# Altium PCB 电机驱动2.PcbDoc
Units mm, origin at the board's own origin, x right, y up, seen from the top; angles counter-clockwise.
Board outline 70.33 x 33.03 mm, 2 copper layers (Top Layer, Bottom Layer); 44 components, 28 nets, 129 pads, 42 vias.
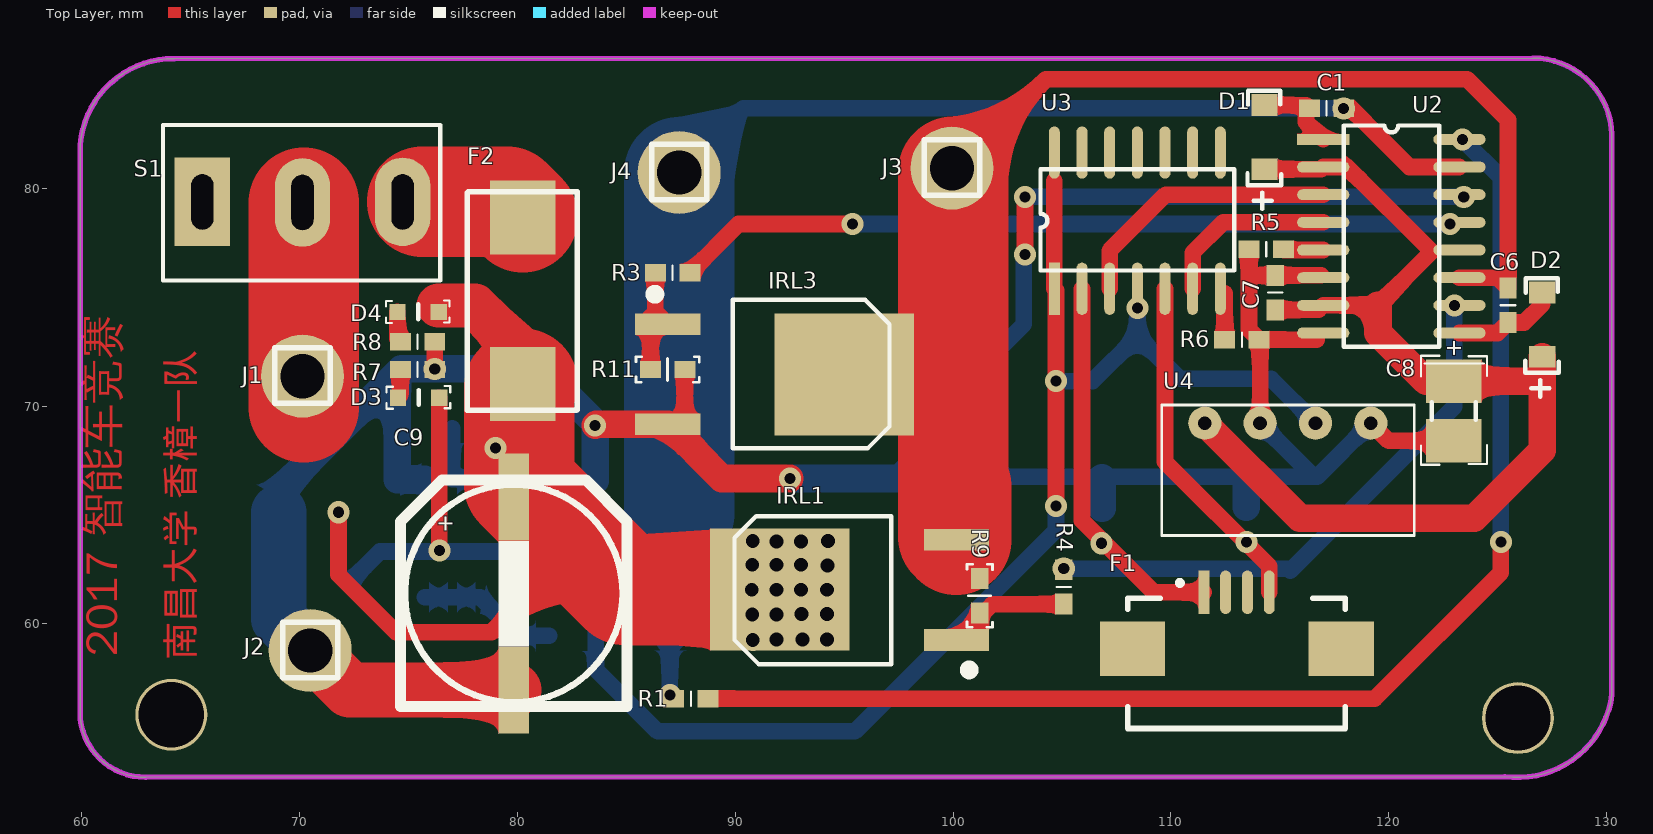
[diagram p0: Top Layer view]
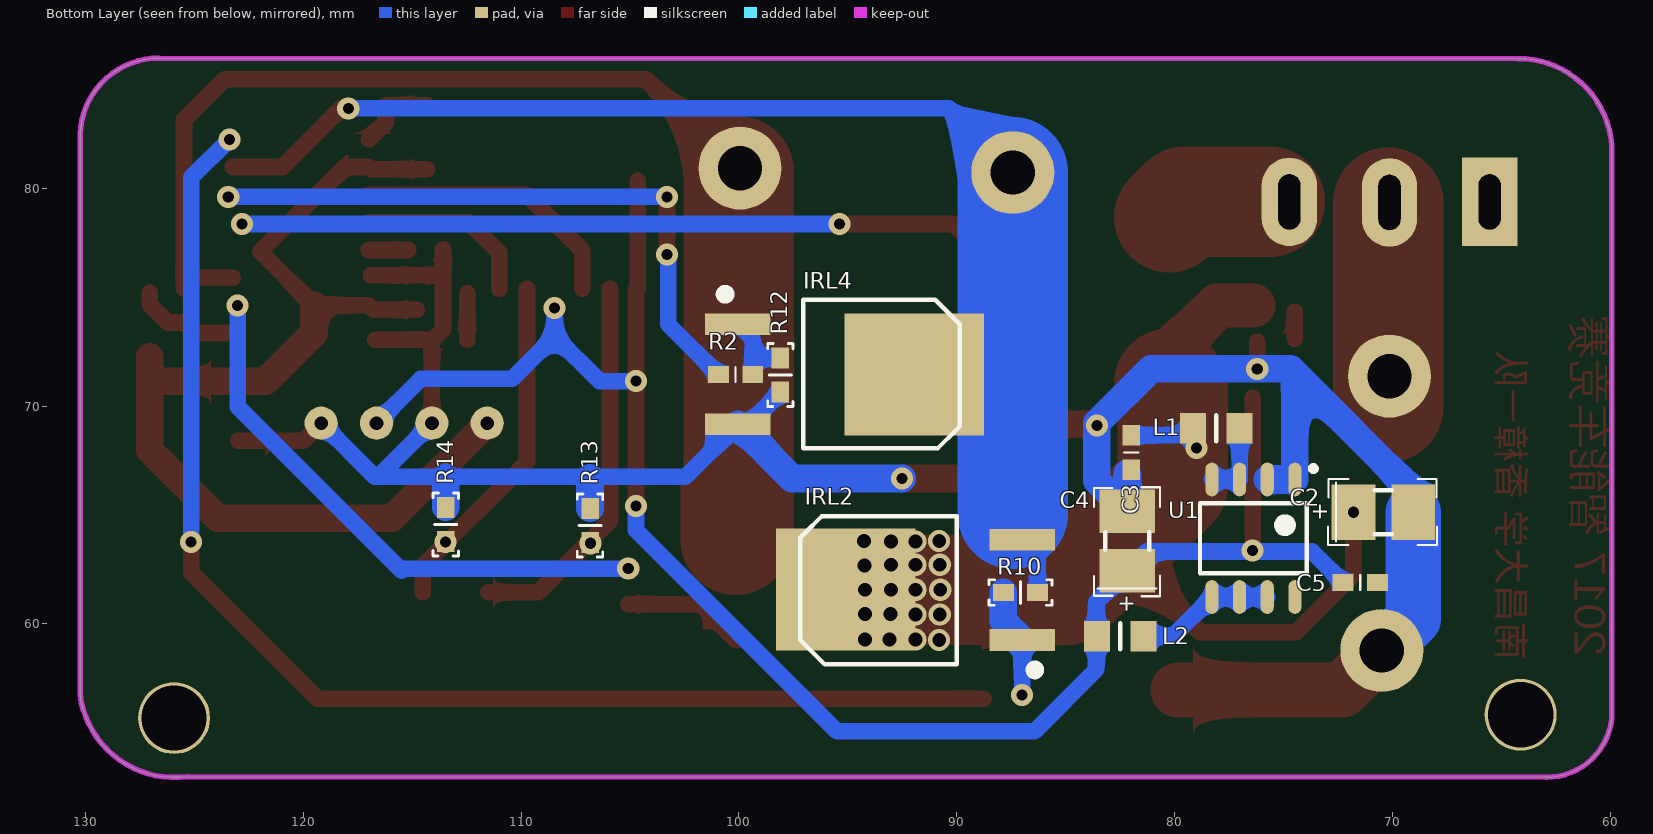
[diagram p1: Bottom Layer view, seen from below]
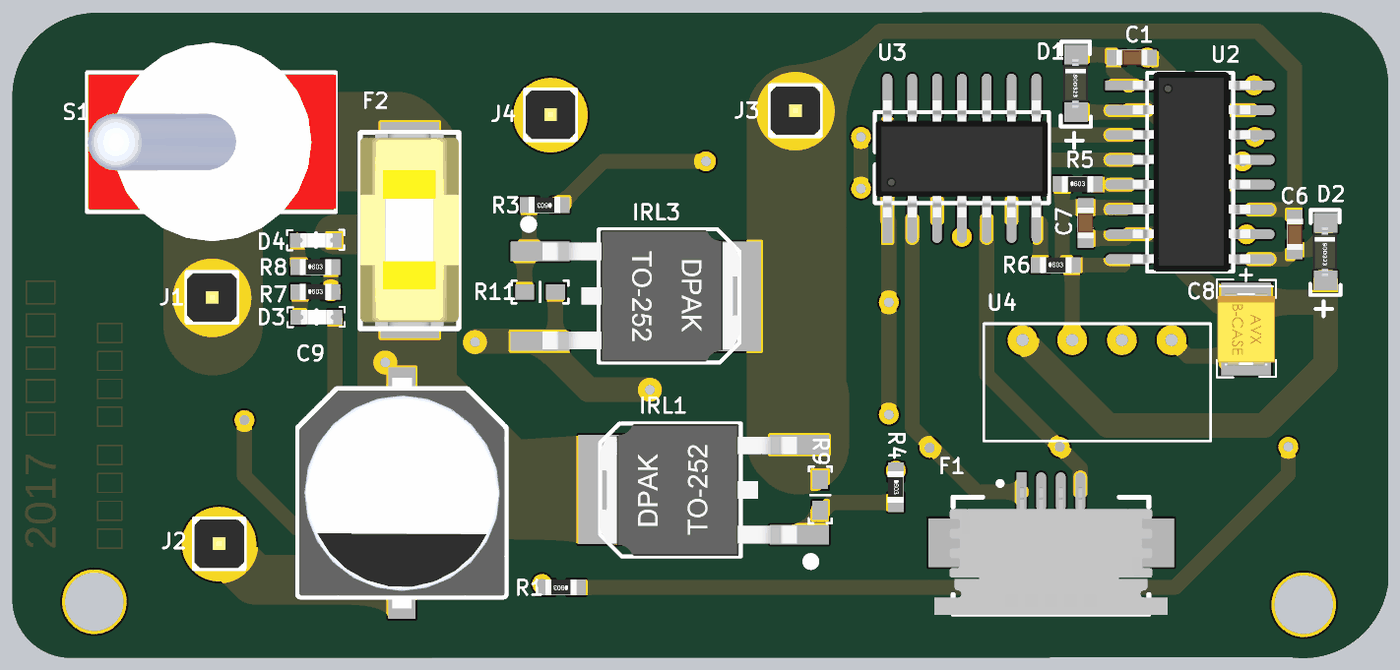
[diagram p2: 3D render of the assembled board from above, using the file's embedded part models]
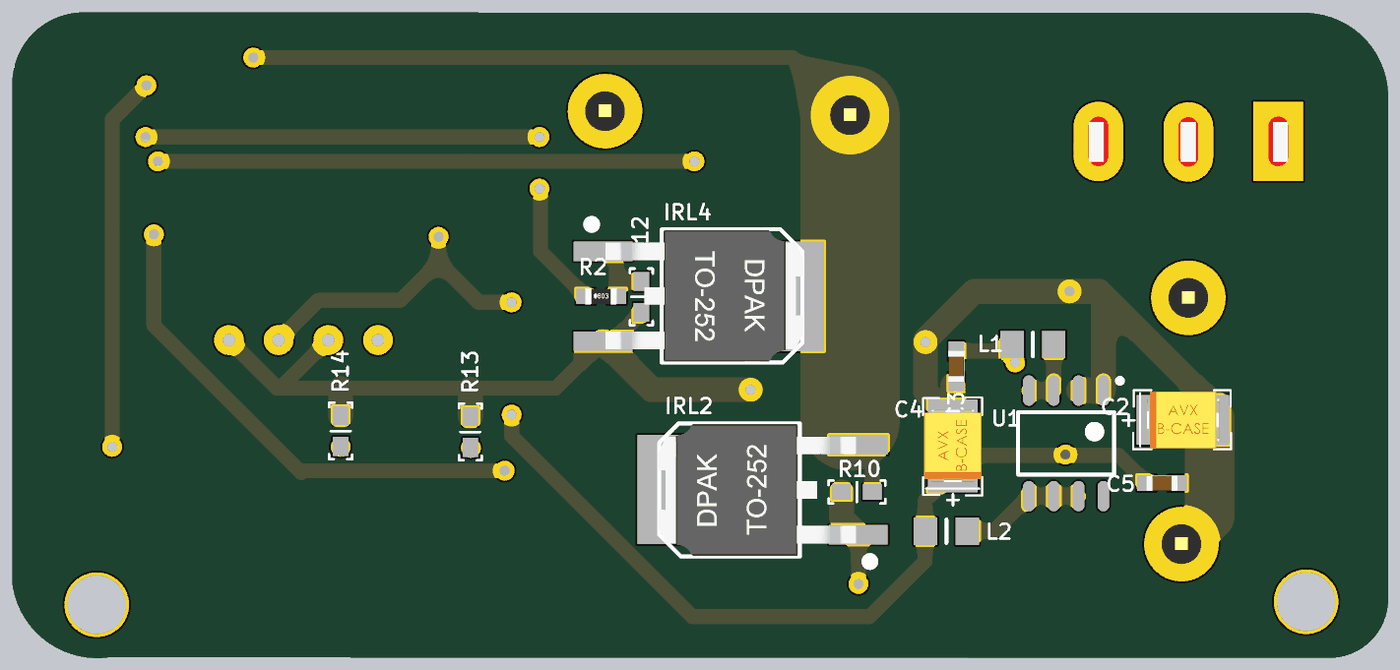
[diagram p3: 3D render of the assembled board from below, using the file's embedded part models]

## Layer stack, top to bottom
Top Solder: solder mask 0.0102, Solder Resist, Dk 3.5
Top Layer: signal copper 0.0356
Dielectric 1: dielectric 0.32, FR-4, Dk 4.8
Bottom Layer: signal copper 0.0356
Bottom Solder: solder mask 0.0102, Solder Resist, Dk 3.5

## Board outline
59.919,55.931 ccw(c62.913,55.954) 62.937,52.96 125.324,52.984 ccw(c125.902,57.331) 130.248,56.753 130.248,82.458 ccw(c126.615,82.342) 126.62,85.977 126.614,85.978 64.237,85.954 ccw(c64.211,81.66) 59.917,81.66 59.919,81.636

## Design rules (kind name [scope] priority, off if disabled: settings)
Clearance [All] p1: gap=0.254
PolygonConnect [All] p1: connectstyle=Relief reliefconductorwidth=0.254 reliefentries=4 polygonreliefangle="90 Angle" airgapwidth=0.254
RoutingVias [All] p1: holewidth=0.508 width=1.016 viastyle="Through Hole" minholewidth=0.508 minwidth=1.016 maxholewidth=0.508 maxwidth=1.016
SolderMaskExpansion [All] p1: expansion=0.102
Width [All] p1: maxlimit=7.62 minlimit=0.076 preferedwidth=0.762
29 further rules are at their usual default settings.

## Components (designator, comment, footprint, x,y, rotation, side; value= is the part's Value field where it differs from the comment)
C1 "CAP-0603(1608)" CAP-0603 117.145,83.668 r0 top
C2 "CAP-TAN-3528(B)" CAP-3528 70.409,65.126 r180 bottom
C3 "CAP-0603(1608)" CAP-0603 81.991,67.869 r90 bottom
C4 "CAP-TAN-3528(B)" CAP-3528 82.169,63.805 r90 bottom
C5 "CAP-0603(1608)" CAP-0603 71.476,61.9 r0 bottom
C6 "CAP-0603(1608)" CAP-0603 125.476,74.625 r90 top
C7 "CAP-0603(1608)" CAP-0603 114.783,75.209 r270 top
C8 "CAP-TAN-3528(B)" CAP-3528 122.987,69.774 r270 top
C9 "CAP-SMD-1000UF" CAP-SMD-1000UF 79.223,61.366 r270 top
D1 "1N5819-S4" SOD-323 114.427,82.448 r90 top
D2 "1N5819-S4" SOD-323 127.178,73.838 r90 top
D3 "LED-0603" LED-0603 75.463,70.383 r180 top
D4 "LED-0603" LED-0603 75.438,74.32 r180 top
F1 "FPC-1.0-4" FPC-1.0-4 112.878,58.623 r0 top
F2 "FUSE-1808-Base" Fuse1808_Base 80.239,78.664 r270 top
IRL1 "IRLR7843" TO-252 100.101,61.646 r90 top
IRL2 "IRLR7843" TO-252 87.046,61.646 r90 bottom
IRL3 "IRLR7843" TO-252 86.944,71.374 r270 top
IRL4 "IRLR7843" TO-252 100,71.374 r270 bottom
J1 "IN+" HEADER1X1 70.129,71.399 r0 top
J2 "IN-" HEADER1X1 70.485,58.801 r0 top
J3 "OUT-" HEADER1X1 99.949,80.95 r0 top
J4 "OUT+" HEADER1X1 87.427,80.747 r0 top
L1 "INTUCTOR" "L0805 - duplicate" 78.08,68.986 r0 bottom
L2 "INTUCTOR" "L0805 - duplicate" 82.499,59.436 r0 bottom
R1 "RES-0603" RES-0603 87.96,56.566 r180 top
R2 "RES-0603" RES-0603 100.152,71.45 r180 bottom
R3 "RES-0603" RES-0603 87.122,76.124 r180 top
R4 "RES-0603" RES-0603 105.08,61.697 r270 top
R5 "RES-0603" RES-0603 114.376,77.191 r0 top
R6 "RES-0603" RES-0603 113.259,73.05 r0 top
R7 "RES-0603" RES-0603 75.413,71.679 r0 top
R8 "RES-0603" RES-0603 75.413,72.949 r0 top
R9 "RES" 0603RC 101.219,62.078 r270 top
R10 "RES" 0603RC 86.284,61.443 r0 bottom
R11 "RES" 0603RC 87.681,71.679 r180 top
R12 "RES" 0603RC 98.095,70.637 r90 bottom
R13 "1K" 0603RC 106.832,65.303 r270 bottom
R14 "1K" 0603RC 113.462,65.354 r270 bottom
S1 "SW-B" SW-B 70.129,79.35 r0 top
U1 "TPS7350" TPS7350(7333) 76.378,63.932 r270 bottom
U2 "HIP4082IB" SOIC16 116.992,82.245 r0 top
U3 "74HC08" SOIC14 104.648,75.514 r90 top
U4 "B0512-S-1W" B0512_S_1W 115.113,67.183 r0 top

## Footprints (in the part's own frame and the unit in brackets; to place one, negate y for a bottom-side part, rotate by r counter-clockwise, add the part's x,y. Pads: shape width x height; smd on the part's side, far side on the other; paste and mask are expansions set on the pad)
0603RC [mm]
  rect 0.965x0.8 smd: 1(0,0) 2(1.575,0)
  silkscreen extent -0.66,-0.58 2.24,0.58
B0512_S_1W [mil]
  round 60 hole 25: 1(160,80) 2(60,80) 3(-40,80) 4(-140,80)
  silkscreen extent -218,-123 239,113
CAP-0603 [mm]
  rect 0.96x0.8 smd: 1(-0.79,0) 2(0.79,0)
  silkscreen extent 0,-0.33 0,0.33, body extent -0.8,-0.41 0.8,0.41, height 0.8
CAP-3528 [mm]
  rect 2x2.54 smd: 1(-1.373,0) 2(1.373,0)
  silkscreen extent -2.54,-1.5 2.47,1.52, body extent -1.85,-1.47 1.85,1.46, height 2.03
CAP-SMD-1000UF [mm]
  rect 4x1.4 smd: 1(-4.455,0.61) 2(4.404,0.61)
  silkscreen extent -5.23,-4.59 5.16,5.81, body extent -5.93,-4.64 5.87,5.86, height 10.3
FPC-1.0-4 [mm]
  rect 3x2.5 smd: 0(-4.64,0.227) 0(4.936,0.227)
  rect 0.5x2 smd: 1(-1.365,2.825)
  oval 0.5x2 smd: 2(-0.365,2.825) 3(0.635,2.825) 4(1.635,2.825)
  silkscreen extent -4.87,-3.43 5.13,3.36, body extent -5.82,-3.47 6.1,3.08, height 2.66
Fuse1808_Base [mm]
  rect 3.4x3 smd: 1(0,0) 2(7.645,0)
  silkscreen extent -1.17,-2.54 8.86,2.5, body extent -1.1,-2.54 8.72,2.49, height 3.81
HEADER1X1 [mil]
  round 150 hole 80: 1(0,-0.99)
  silkscreen extent -50,-50 50,50, body extent -50,-49 50,49, height 336
"L0805 - duplicate" [mm]
  rect 1.2x1.4 smd: 1(-1.067,0) 2(1.067,0)
  silkscreen extent 0,-0.6 0,0.6
LED-0603 [mm]
  rect 0.746x0.749 smd: 1(-0.95,0) 2(0.951,0)
  silkscreen extent -1.45,-0.53 1.47,0.51, body extent -0.85,-0.37 0.8,0.36, height 0.68
RES-0603 [mm]
  rect 0.96x0.8 smd: 1(-0.79,0) 2(0.79,0)
  silkscreen extent 0,-0.33 0,0.33, body extent -0.8,-0.41 0.8,0.41, height 0.45
SOD-323 [mm]
  rect 1x1.2 smd: 1(-1.575,0.127) 2(1.372,0.127)
  silkscreen extent -3.4,-0.64 2.03,0.91, body extent -1.35,-0.46 1.15,0.79, height 1
SOIC14 [mm]
  rect 2.4x0.5 smd: 1(-0.127,0)
  oval 2.4x0.5 smd: 2(-0.127,-1.27) 3(-0.127,-2.54) 4(-0.127,-3.81) 5(-0.127,-5.08) 6(-0.127,-6.35) 7(-0.127,-7.62) 8(6.127,-7.62) 9(6.127,-6.35) 10(6.127,-5.08) 11(6.127,-3.81) 12(6.127,-2.54) 13(6.127,-1.27) 14(6.127,0)
  silkscreen extent 0.71,-8.25 5.36,0.64, body extent -0.03,-8.2 5.97,0.6, height 1.7
SOIC16 [mm]
  rect 2.4x0.5 smd: 1(0,0)
  oval 2.4x0.5 smd: 2(0,-1.27) 3(0,-2.54) 4(0,-3.81) 5(0,-5.08) 6(0,-6.35) 7(0,-7.62) 8(0,-8.89) 9(6.254,-8.89) 10(6.254,-7.62) 11(6.254,-6.35) 12(6.254,-5.08) 13(6.254,-3.81) 14(6.254,-2.54) 15(6.254,-1.27) 16(6.254,0)
  silkscreen extent 0.94,-9.53 5.33,0.64, body extent 0.2,-9.52 6.2,0.68, height 1.7
SW-B [mil]
  rect 100x160 hole 40 slot 100 at 90 deg: 1(-181,1)
  oval 100x160 hole 40 slot 100 at 90 deg: 2(0,0) 3(181,1)
  silkscreen extent -252,-141 249,140, body extent -251,-200 250,200, height 1120
TO-252 [mm]
  rect 1x3 smd: 1(-2.388,-0.051) 3(2.212,-0.051)
  rect 5.6x6.4 smd: 2(-0.076,8.052)
  silkscreen extent -3.94,-0.81 3.3,10.13, body extent -3.47,0.08 3.27,10.18, height 2.37
TPS7350(7333) [mm]
  oval 1.55x0.6 smd: 1(-2.7,1.905) 2(-2.7,0.635) 3(-2.7,-0.635) 4(-2.7,-1.905) 5(2.7,-1.905) 6(2.7,-0.635) 7(2.7,0.635) 8(2.7,1.905)
  silkscreen extent -3.32,-2.45 1.6,2.87

## Part data
C2 C4 C8: "0.15~150UF"
D1 D2: "S4"
F2: "保险丝"
J1 J2 J3 J4: library part Header1x1
R1 R2 R3 R4 R5 R6: library part RES-0805
R13 R14: library part Res2, "Resistor"

## Free pads (board coordinates)
  round 3.302 hole 2.997: 0(64.11,55.829) 0(125.933,55.677)

## Via types
v1: diameter 1.016, hole 0.508, Top Layer to Bottom Layer, 22 vias
v2: diameter 1.016, hole 0.635, Top Layer to Bottom Layer, 20 vias

## Nets (pads, with @x,y where several pads share a name; then routed paths per layer and width w, separated by ;. In a path a pad name is that pad's centre, name@x,y a point inside that pad or via, vN(x,y) a via of type N, cw(c..) or ccw(c..) an arc to the next point about the centre after c; other vN are vias at no path point)
5V: C4.1 C5.2 D3.1 L2.2 U3.1 U3.4 U3.14 U4.2 | length 80.8
  Top Layer w0.762: v1(76.414,63.362) D3.1 ; U3.1 104.648,80.34 ; v1(104.724,65.405) v1(104.724,71.145) U3.1@104.724,75.311
  Bottom Layer w0.762: C5.2 73.688,63.322 81.278,63.322 C4.1 83.591,61.009 83.591,57.912 86.436,55.067 95.493,55.067 104.724,64.298 v1(104.724,65.405) ; v1(104.724,71.145) 106.401,71.145 108.458,73.203 ; v1(108.458,74.498) 108.458,73.203 ; U4.2 114.605,71.247 110.414,71.247 108.458,73.203
7.2_MOTOR: C2.1 C3.2 C9.1 D4.1 F2.2 IRL1.2 IRL2.2 L1.2 | length 44.8
  Top Layer w0.762: v1(71.782,65.126) 71.782,62.254 74.422,59.614 78.816,59.614 82.834,63.632
  Top Layer w2.032: D4.1@76.388,74.619 78.035,74.619 80.239,72.415 F2.2
  Top Layer w5.08: F2.2 80.086,70.866 80.086,66.38 82.834,63.632 84.897,61.57 v2(90.754,61.57) v2(91.897,61.57) IRL1.2
  Bottom Layer w0.762: v1(78.983,68.069) 79.573,68.659 C3.2
  other v2: 90.805,59.258 91.897,59.284 93.091,59.284 94.209,59.284 90.78,60.427 91.897,60.427 93.04,60.452 94.209,60.452 93.015,61.57 94.209,61.57 94.234,62.687 90.78,62.713 91.897,62.713 93.015,62.713 91.897,63.779 93.015,63.779 90.805,63.805 94.259,63.805
12V: C7.2 C8.1 D1.1 D2.1 U2.2 U2.7 U2.12 U4.4 | length 49.6
  Top Layer w0.762: D1.1 U2.2@116.891,80.874 ; C7.2 U2.7@116.787,74.419 ; U2.7 119.509,74.625 121.973,77.089 118.086,80.975 U2.2
  Top Layer w1.27: U4.4 115.926,64.846 123.927,64.846 127.051,67.97 D2.1 ; 119.509,74.625 119.509,73.353 121.715,71.147 C8.1 126.897,71.147
AGND: C2.2 C3.1 C4.2 C5.1 C7.1 C8.2 C9.2 IRL3.3 IRL4.3 J2.1 R5.1 R6.2 R7.2 R8.2 R11.1 R12.1 R13.1 R14.1 U1.1 U1.2 U2.6 U2.8 U4.1 U4.3 | length 119.1
  Top Layer w0.762: R7.2 v1(76.203,71.707) R8.2 ; 87.681,68.504 R11.1 ; R5.1 113.586,75.893 ; U4.3 R6.2@114.097,73.002 ; 116.688,73.05 R6.2 113.586,73.513 113.586,75.893 ; U2.6@116.888,75.999 C7.1 113.693,75.999 113.586,75.893 ; U4.1 119.991,68.4 C8.2
  Top Layer w1.27: v1(83.566,69.113) 83.614,69.162 IRL3.3 89.38,66.675 v1(92.507,66.675)
  Top Layer w2.54: J2.1 72.299,56.962 C9.2
  Bottom Layer w0.762: R12.1 IRL4.3@99.571,69.162 ; IRL4.3 102.461,66.751 116.561,66.751 ; U4.3 116.561,66.751 ; U4.1 116.713,66.751 116.561,66.751
  Bottom Layer w1.27: C2.2 69.035,66.064 74.473,71.501 ; U1.2 U1.1 74.473,71.501 ; C3.1@82.169,66.901 C4.2 83.566,66.575 v1(83.566,69.113) 83.566,69.221 81.08,71.707 v1(76.203,71.707) 74.679,71.707 74.473,71.501 ; v1(92.507,66.675) 97.564,66.675 IRL4.3 ; R13.1 106.832,66.7 ; R14.1 113.462,66.726
  Bottom Layer w2.54: C2.2 69.035,60.226 J2.1
DGND: R6.1 U3.7 | length 2.1
  Top Layer w0.762: R6.1 U3.7@112.469,75.187
MOTOR1+: C1.2 IRL2.3 IRL4.2 J4.1 R10.1 U2.15 | length 55.6
  Top Layer w0.762: C1.2@117.935,83.589 C1.2 118.262,83.668 120.955,80.975 U2.15
  Bottom Layer w0.762: R10.1 86.284,63.147 ; J4.1 90.373,83.668 v1(117.932,83.668)
  Bottom Layer w5.08: 87.427,65.068 J4.1
MOTOR1-: C6.2 IRL1.3 IRL3.2 J3.1 R9.1 U2.11 | length 57.6
  Top Layer w0.762: J3.1@100,80.747 104.267,85.014 123.596,85.014 125.476,83.134 C6.2 124.996,75.895 U2.11
  Top Layer w5.08: IRL1.3@100,64.011 100,66.446 ; J3.1@100,80.747 100,66.446 ; IRL1.3 100.152,66.294 100,66.446
NetC1_1: C1.1 D1.2 U2.1 | length 3.7
  Top Layer w0.762: D1.2 116.202,83.82 C1.1 ; C1.1@116.202,83.515 116.202,83.035 U2.1
NetC6_1: C6.1 D2.2 U2.9 | length 4.9
  Top Layer w0.762: U2.9 124.996,73.355 C6.1 126.21,73.835 127.051,74.676 D2.2
NetD3_2: D3.2 R7.1 | length 1.2
  Top Layer w0.762: D3.2@74.623,70.493 R7.1
NetD4_2: D4.2 R8.1 | length 1.2
  Top Layer w0.762: R8.1@74.487,73.084 D4.2
NetF2_1: F2.1 S1.3 | length 4.9
  Top Layer w5.08: S1.3@75.641,79.375 79.527,79.375 F2.1
NetIRL1_1: IRL1.1 R4.2 R9.2 | length 5.5
  Top Layer w0.762: IRL1.1 101.75,60.856 ; 101.801,60.907 R4.2
NetIRL2_1: IRL2.1 R1.2 R10.2 | length 5.1
  Bottom Layer w0.762: v1(86.995,56.741) IRL2.1
  Bottom Layer w1.27: IRL2.1 87.859,60.122 R10.2
NetIRL3_1: IRL3.1 R3.2 R11.2 | length 5
  Top Layer w0.762: R11.2 IRL3.1@86.106,74.097 ; R3.2 86.332,74.323 IRL3.1
NetIRL4_1: IRL4.1 R2.2 R12.2 | length 3.9
  Bottom Layer w0.762: R12.2 99.362,72.212 ; R2.2 99.362,73.073 IRL4.1
NetJ1_1: J1.1 S1.2 | length 9.4
  Top Layer w5.08: J1.1@70.18,69.952 S1.2@70.18,79.324
NetL1_2: L1.1 U1.3 U1.4 | length 3.6
  Bottom Layer w0.762: L1.1 U1.3 U1.4
NetL2_1: L2.1 U1.5 U1.6 U1.7 | length 6.4
  Bottom Layer w0.762: U1.7 U1.6 U1.5 80.053,59.461 L2.1@81.458,59.461
NetR1_1: R1.1 U2.16 | length 59.4
  Top Layer w0.762: R1.1 119.355,56.566 125.146,62.357 v1(125.146,63.754)
  Bottom Layer w0.762: v1(123.393,82.245) 125.146,80.493 v1(125.146,63.754)
NetR2_1: R2.1 U2.14 | length 29.3
  Top Layer w0.762: v1(103.302,76.962) v1(103.302,79.604)
  Bottom Layer w0.762: R2.1 103.251,73.759 103.251,76.911 v1(103.302,76.962) ; v1(103.302,79.604) v1(123.444,79.604)
NetR3_1: R3.1 U2.13 | length 35.8
  Top Layer w0.762: R3.1 90.147,78.359 v1(95.377,78.359)
  Bottom Layer w0.762: v1(95.377,78.359) v1(122.809,78.359)
NetR4_1: R4.1 U2.10 | length 25.6
  Bottom Layer w0.762: v1(105.08,62.535) 115.372,62.535 ; 115.471,62.436 123.012,69.977 v1(123.012,74.625)
NetR5_2: R5.2 U2.5 | length 1.8
  Top Layer w0.762: R5.2@115.192,77.165 U2.5
PWM1: F1.4 R14.2 U3.5 | length 15.9
  Top Layer w0.762: U3.5 109.728,67.437 114.513,62.652 F1.4
  other v1: 113.462,63.754
PWM1N1: U2.4 U3.6 | length 8.2
  Top Layer w0.762: U3.6 110.998,77.038 112.395,78.435 U2.4
PWM1N2: U2.3 U3.3 | length 12.6
  Top Layer w0.762: U3.3 107.188,77.14 109.753,79.705 U2.3
PWM2: F1.1 R13.2 U3.2 | length 17.6
  Top Layer w0.762: U3.2 105.918,64.745 109.215,61.448 F1.1
  other v1: 106.807,63.703
pads on no net: F1.0 F1.2 F1.3 S1.1 U1.8 U3.8 U3.9 U3.10 U3.11 U3.12 U3.13

## Keep-outs
Keep-Out Layer:
  lines w0.254: 59.917,81.66 cw(c64.211,81.66) 64.237,85.954 126.614,85.978 ; 59.919,55.931 ccw(c62.913,55.954) 62.937,52.96 125.324,52.984 ccw(c125.902,57.331) 130.248,56.753 130.248,82.458 ccw(c126.615,82.342) 126.62,85.977 ; 59.919,55.954 59.919,81.636

## Other copper
Top Layer:
  text "2017 智能车竞赛" at 62.128,58.496 h2.54 r90
  text "南昌大学 香樟一队" at 65.557,58.344 h2.16 r90

## Text inside footprints (layer, text, board x,y; h text height)
C2: Bottom Overlay "+" at 73.734,64.821 h0.76
C4: Bottom Overlay "+" at 81.864,60.479 h0.76 r270
C8: Top Overlay "+" at 122.682,73.099 h0.76 r270
C9: Top Overlay "+" at 76.392,65.041 h0.76 r270
U1: Mechanical 15 "1" at 76.542,63.482 h1.02